# Altium PCB TempSensor.PcbDoc
Units mil, origin at the board's own origin, x right, y up, seen from the top; angles counter-clockwise.
Board outline 1600 x 1110 mil, 2 copper layers (Top Layer, Bottom Layer); 11 components, 10 nets, 46 pads, 1 vias.
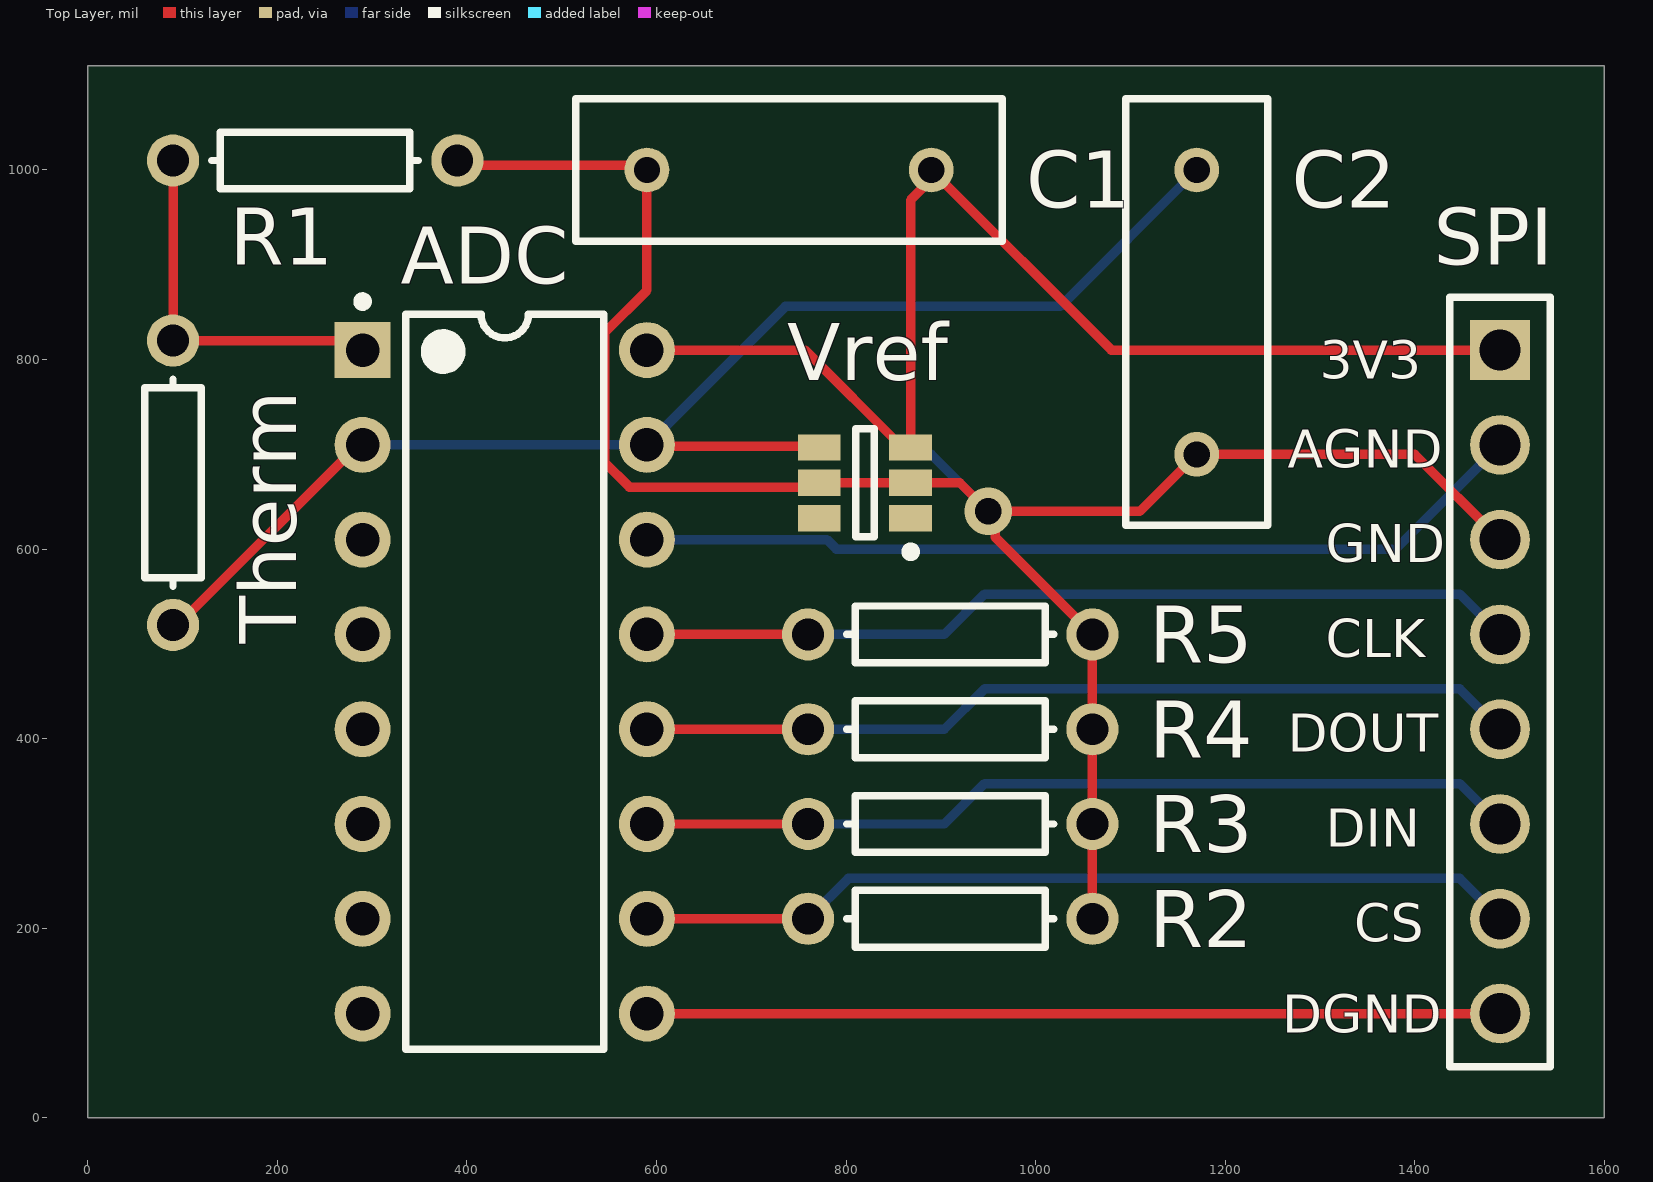
[diagram p0: Top Layer view]
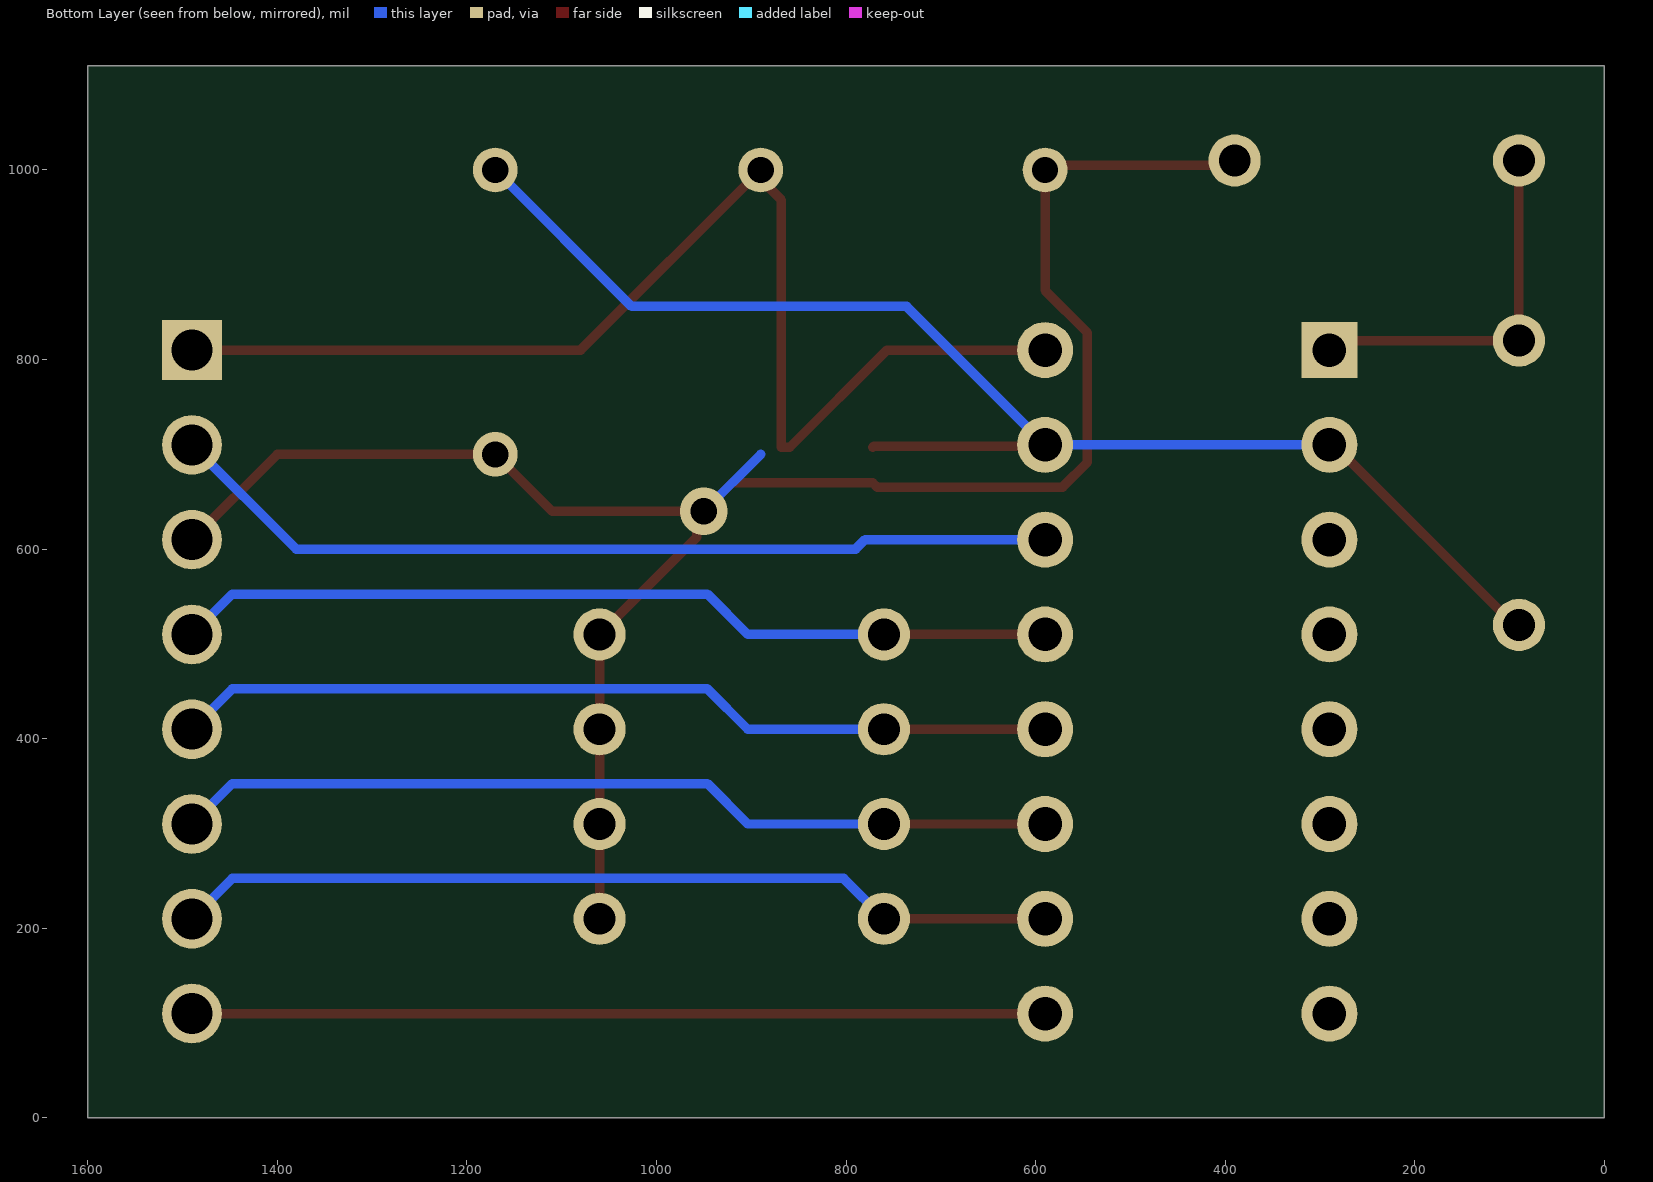
[diagram p1: Bottom Layer view, seen from below]

## Layer stack, top to bottom
Top Solder: solder mask 0.4, Solder Resist, Dk 3.5
Top Layer: signal copper 1.4
Dielectric 1: dielectric 12.6, FR-4, Dk 4.8
Bottom Layer: signal copper 1.4
Bottom Solder: solder mask 0.4, Solder Resist, Dk 3.5

## Board outline
0,0 1600,0 1600,1110 0,1110

## Design rules (kind name [scope] priority, off if disabled: settings)
Clearance [All] p1: gap=10 ignorepadtopadclearanceinfootprint=FALSE except(0: Arc-Hole Track-Hole SMDPad-Hole THPad-Hole Via-Hole Fill-Hole Poly-Hole Region-Hole Text-Hole; 5: SMDPad-SMDPad)
PolygonConnect [All] p1: connectstyle=Relief reliefconductorwidth=10 reliefentries=4 polygonreliefangle="90 Angle" airgapwidth=10
RoutingVias [All] p1: holewidth=28 width=50 viastyle="Through Hole" minholewidth=28 minwidth=50 maxholewidth=28 maxwidth=50
SolderMaskExpansion [All] p1: expansion=4 istentingtop=FALSE
Width [All] p1: maxlimit=10 minlimit=10 preferedwidth=10
30 further rules are at their usual default settings.

## Classes and differential pairs
component class TempSensor: ADC C1 R1 R2 R3 R4 R5 SPI Therm Vref

## Components (designator, comment, footprint, x,y, rotation, side; value= is the part's Value field where it differs from the comment)
ADC "MCP3008-I/P" PDIP300-P16 440,460 r0 top
C1 "Cap" RAD-0.3 740,1000 r0 top value=100nF
C2 "Cap" RAD-0.3 1170,850 r90 top value=100nF
R1 "Res1" AXIAL-0.3 240,1010 r180 top value=440
R2 "Res1" AXIAL-0.3 910,210 r180 top value=1K
R3 "Res1" AXIAL-0.3 910,310 r180 top value=1K
R4 "Res1" AXIAL-0.3 910,410 r180 top value=1K
R5 "Res1" AXIAL-0.3 910,510 r180 top value=1K
SPI "61300811121" 61300811121 1490,460 r270 top (schematic designator Pins)
Therm "Thermistor" AXIAL-0.3 90,670 r270 top value=10K
Vref "ADR130AUJZ-REEL7" ADI-UJ-6_M 820,670 r180 top

## Footprints (in the part's own frame and the unit in brackets; to place one, negate y for a bottom-side part, rotate by r counter-clockwise, add the part's x,y. Pads: shape width x height; smd on the part's side, far side on the other; paste and mask are expansions set on the pad)
61300811121 [mm] "Pin Header, pitch 2.54 mm, THT, Vertical, single row, 8p"
  rect 1.6x1.6 hole 1.1: 1(-8.89,0)
  round 1.6 hole 1.1: 2(-6.35,0) 3(-3.81,0) 4(-1.27,0) 5(1.27,0) 6(3.81,0) 7(6.35,0) 8(8.89,0)
  silkscreen extent -10.31,-1.35 10.31,1.35, body extent -10.16,-1.27 10.16,1.27, height 8.57
ADI-UJ-6_M [mm] "SOT23, 6-Leads, Body 2.9x1.6mm, Pitch 0.95mm, IPC Low Density"
  rect 1.15x0.7 smd: 1(-1.225,0.95) 2(-1.225,0) 3(-1.225,-0.95) 4(1.225,-0.95) 5(1.225,0) 6(1.225,0.95)
  silkscreen extent -1.35,-1.45 0.25,1.97, body extent -0.8,-1.45 0.8,1.45, height 1
AXIAL-0.3 [mm] "Axial Device, Thru-Hole; 2 Leads; 0.3 in Pin Spacing"
  round 1.4 hole 0.85: 1(-3.81,0) 2(3.81,0)
  silkscreen extent -2.77,-0.76 2.77,0.76
PDIP300-P16 [mm] "DIP, 16-Leads, Row Spacing 7.62mm, Pitch 2.54mm, Body 19.2x6.6mm"
  rect 1.5x1.5 hole 0.9: 1(-3.81,8.89)
  round 1.5 hole 0.9: 2(-3.81,6.35) 3(-3.81,3.81) 4(-3.81,1.27) 5(-3.81,-1.27) 6(-3.81,-3.81) 7(-3.81,-6.35) 8(-3.81,-8.89) 9(3.81,-8.89) 10(3.81,-6.35) 11(3.81,-3.81) 12(3.81,-1.27) 13(3.81,1.27) 14(3.81,3.81) 15(3.81,6.35) 16(3.81,8.89)
  silkscreen extent -3.93,-9.85 2.65,10.31, body extent -3.55,-9.85 3.55,9.85, height 5.34
RAD-0.3 [mm] "Radial Cap, Thru-Hole; 2 Leads; 0.3 in Pin Spacing"
  round 1.2 hole 0.7: 1(-3.81,0) 2(3.81,0)
  silkscreen extent -5.71,-1.91 5.71,1.91

## Part data
ADC: library part CMP-0188-00184-2, "2.7V 4-Channel/8-Channel 10-Bit A/D Converters with SPI Serial Interface, 16-Pin PDIP, Industrial Temperature", Code_JEDEC=MS-001-BB, ComponentLink1Description="Manufacturer URL", ComponentLink1URL=http://www.microchip.com/, ComponentLink2Description=Datasheet, ComponentLink2URL=http://ww1.microchip.com/downloads/en/DeviceDoc/21295d.pdf, ComponentLink3Description="Package Specification", ComponentLink3URL=http://www.microchip.com/stellent/groups/techpub_sg/documents/packagingspec/en012702.pdf, DatasheetVersion="revD, Dec-2008", PackageDescription="16-Lead Plastic Dual In-Line (P) - 300 mil Body [PDIP]", PackageReference=PDIP300-P16, PackageVersion="revBB, Aug-2009", RevisionNote="URLs added."
C1 C2: "Capacitor", LatestRevisionDate=17-Jul-2002, LatestRevisionNote="Re-released for DXP Platform.", PackageDescription="Radial Cap, Thru-Hole; 2 Leads; 0.3 in Pin Spacing", PackageReference=RAD-0.3, Published=8-Jun-2000, Publisher="Altium Limited"
R1 R2 R3 R4 R5: "Resistor", LatestRevisionDate=17-Jul-2002, LatestRevisionNote="Re-released for DXP Platform.", PackageDescription="Axial Device, Thru-Hole; 2 Leads; 0.3 in Pin Spacing", PackageReference=AXIAL-0.3, Published=8-Jun-2000, Publisher="Altium Limited"
SPI: library part CMP-1502-01076-1, "THT Vertical Pin Header WR-PHD, Pitch 2.54 mm, Single Row, 8 pins", Contact Resistance=20mOhm, Manufacturer="Wurth Elektronik", Operating Temperature=-40to105degC, Rated Current=3A, Withstanding Voltage=500VAC, Working Voltage=250VAC, Datasheet URL=https://katalog.we-online.de/em/datasheet/6130xx11121.pdf, Gender=Male, Manufacturer URL=http://www.we-online.de, Mounting Technology=THT, Orientation=Vertical, Package Reference=61300811121, Packaging=Bag, Part Number=61300811121, Pin Number=8, Pitch=2.54mm, Publisher=WurthElektronik, Row Number=Single
Therm: library part Res1, LatestRevisionDate=17-Jul-2002, LatestRevisionNote="Re-released for DXP Platform.", PackageDescription="Axial Device, Thru-Hole; 2 Leads; 0.3 in Pin Spacing", PackageReference=AXIAL-0.3, Published=8-Jun-2000, Publisher="Altium Limited"
Vref: library part CMP-0784-00541-1, "Precision Series Sub-Band Gap Voltage Reference, 1 V Output, 2 to 18 V Supply, Industrial, 6-pin SOT23 (UJ-6), Reel", Manufacturer="Analog Devices", Operating Temp Range="-40 to 125 degC", Code_JEDEC=MO-193-AA, ComponentLink1Description="Manufacturer URL", ComponentLink1URL=http://www.analog.com/en/index.html, ComponentLink2Description=Datasheet, ComponentLink2URL=http://www.analog.com/static/imported-files/data_sheets/ADR130.pdf, ComponentLink3Description="Package Specification", ComponentLink3URL=http://www.analog.com/static/imported-files/packages/PKG_PDF/TSOT(UJ)/UJ_6.pdf, ComponentLink4Description="URL Link1", ComponentLink4URL="Product URL:http://www.analog.com/en/special-linear-functions/voltage-references/adr130/products/product.html", DatasheetVersion="Rev. B", Max V Supply (V)=18, Min V Supply (V)=2, Mounting Technology="Surface Mount", PackageDescription="6-Pin Thin Small Outline Transistor Package, Body 2.9 x 1.6 mm, Pitch 0.95 mm", PackageReference=UJ-6, PackageVersion=Dec-04, Packing=Reel, PartNumber=ADR130AUJZ-REEL7, Ref Out TC (ppm/C)=15, Vout="0.5V, 1V"

## Via types
v1: diameter 50, hole 28, Top Layer to Bottom Layer, 1 vias

## Nets (pads, with @x,y where several pads share a name; then routed paths per layer and width w, separated by ;. In a path a pad name is that pad's centre, name@x,y a point inside that pad or via, vN(x,y) a via of type N, cw(c..) or ccw(c..) an arc to the next point about the centre after c; other vN are vias at no path point)
1V: ADC.2 ADC.15 C2.2 Therm.2 Vref.4 | length 1461.7
  Top Layer w10: Therm.2 95,520 285,710 ADC.2 ; ADC.15 591.3,708.7 770.47,708.7 Vref.4
  Bottom Layer w10: ADC.2 ADC.15 736.13,856.13 1026.13,856.13 C2.2
3V3: ADC.16 C1.2 SPI.1 Vref.3 | length 1301
  Top Layer w10: ADC.16 756.77,810 859.37,707.4 Vref.3 868.23,968.15 890,989.92 C1.2 1080,810 SPI.1
\CS: ADC.10 R2.2 SPI.7 | length 935.3
  Top Layer w10: ADC.10 R2.2
  Bottom Layer w10: R2.2 802.56,252.56 1447.44,252.56 SPI.7
AGND: ADC.14 SPI.2 | length 949.7
  Bottom Layer w10: ADC.14 779.92,610 789.92,600 1380,600 SPI.2
CLK: ADC.13 R5.2 SPI.4 | length 935.3
  Top Layer w10: ADC.13 R5.2
  Bottom Layer w10: R5.2 903.64,510 946.2,552.56 1447.44,552.56 SPI.4
DGND: ADC.9 SPI.8 | length 907.1
  Top Layer w10: ADC.9@595,115 ADC.9 SPI.8
DIN: ADC.11 R3.2 SPI.6 | length 935.3
  Top Layer w10: ADC.11 R3.2
  Bottom Layer w10: R3.2 903.64,310 946.2,352.56 1447.44,352.56 SPI.6
DOUT: ADC.12 R4.2 SPI.5 | length 935.3
  Top Layer w10: ADC.12 R4.2
  Bottom Layer w10: R4.2 903.64,410 946.2,452.56 1447.44,452.56 SPI.5
GND: C1.1 C2.1 R1.1 R2.1 R3.1 R4.1 R5.1 SPI.3 Vref.2 Vref.5 | length 2123.2
  Top Layer w10: R1.1 395,1005 585,1005 C1.1 590,872.97 545.47,828.44 545.47,691.56 571.56,665.47 767.24,665.47 Vref.5 Vref.2 920,670 v1(950,640) ; R2.1 R3.1 R4.1 R5.1 957.65,612.35 957.65,632.35 v1(950,640) ; SPI.3 1400,700 C2.1 1110,640 v1(950,640)
  Bottom Layer w10: 890,700 v1(950,640)
NetADC_1: ADC.1 R1.2 Therm.1 | length 394.1
  Top Layer w10: R1.2 Therm.1 280,820 ADC.1
pads on no net: ADC.3 ADC.4 ADC.5 ADC.6 ADC.7 ADC.8 Vref.1 Vref.6

## Silkscreen, mask and mechanical layers (free items; w line width, h text height)
Top Overlay:
  text "AGND" at 1266,686 h40
  text "GND" at 1306,586 h40
  text "CLK" at 1306,486 h40
  text "DOUT" at 1266,386 h40
  text "DIN" at 1306,286 h40
  text "CS" at 1336,186 h40

## Text inside footprints (layer, text, board x,y; h text height)
SPI: Top Overlay "DGND" at 1260,90 h40; Top Overlay "3V3" at 1300,780 h40